# Altium PCB uTCA_MCH_PCB3.pcbdoc (part 5 of 8)
Units mm, origin at the board's own origin, x right, y up, seen from the top; angles counter-clockwise.
Board outline 182.75 x 75.8 mm, 10 copper layers (Top Layer, GND1, MidLayer1, PWR1, Mid-Layer 2, GND2, PWR2, Mid-Layer 3, GND3, Bottom Layer), stack 1.568 mm thick; 778 components, 977 nets, 4756 pads, 1214 vias.
Unrouted connection lines stored in the file: 1790.
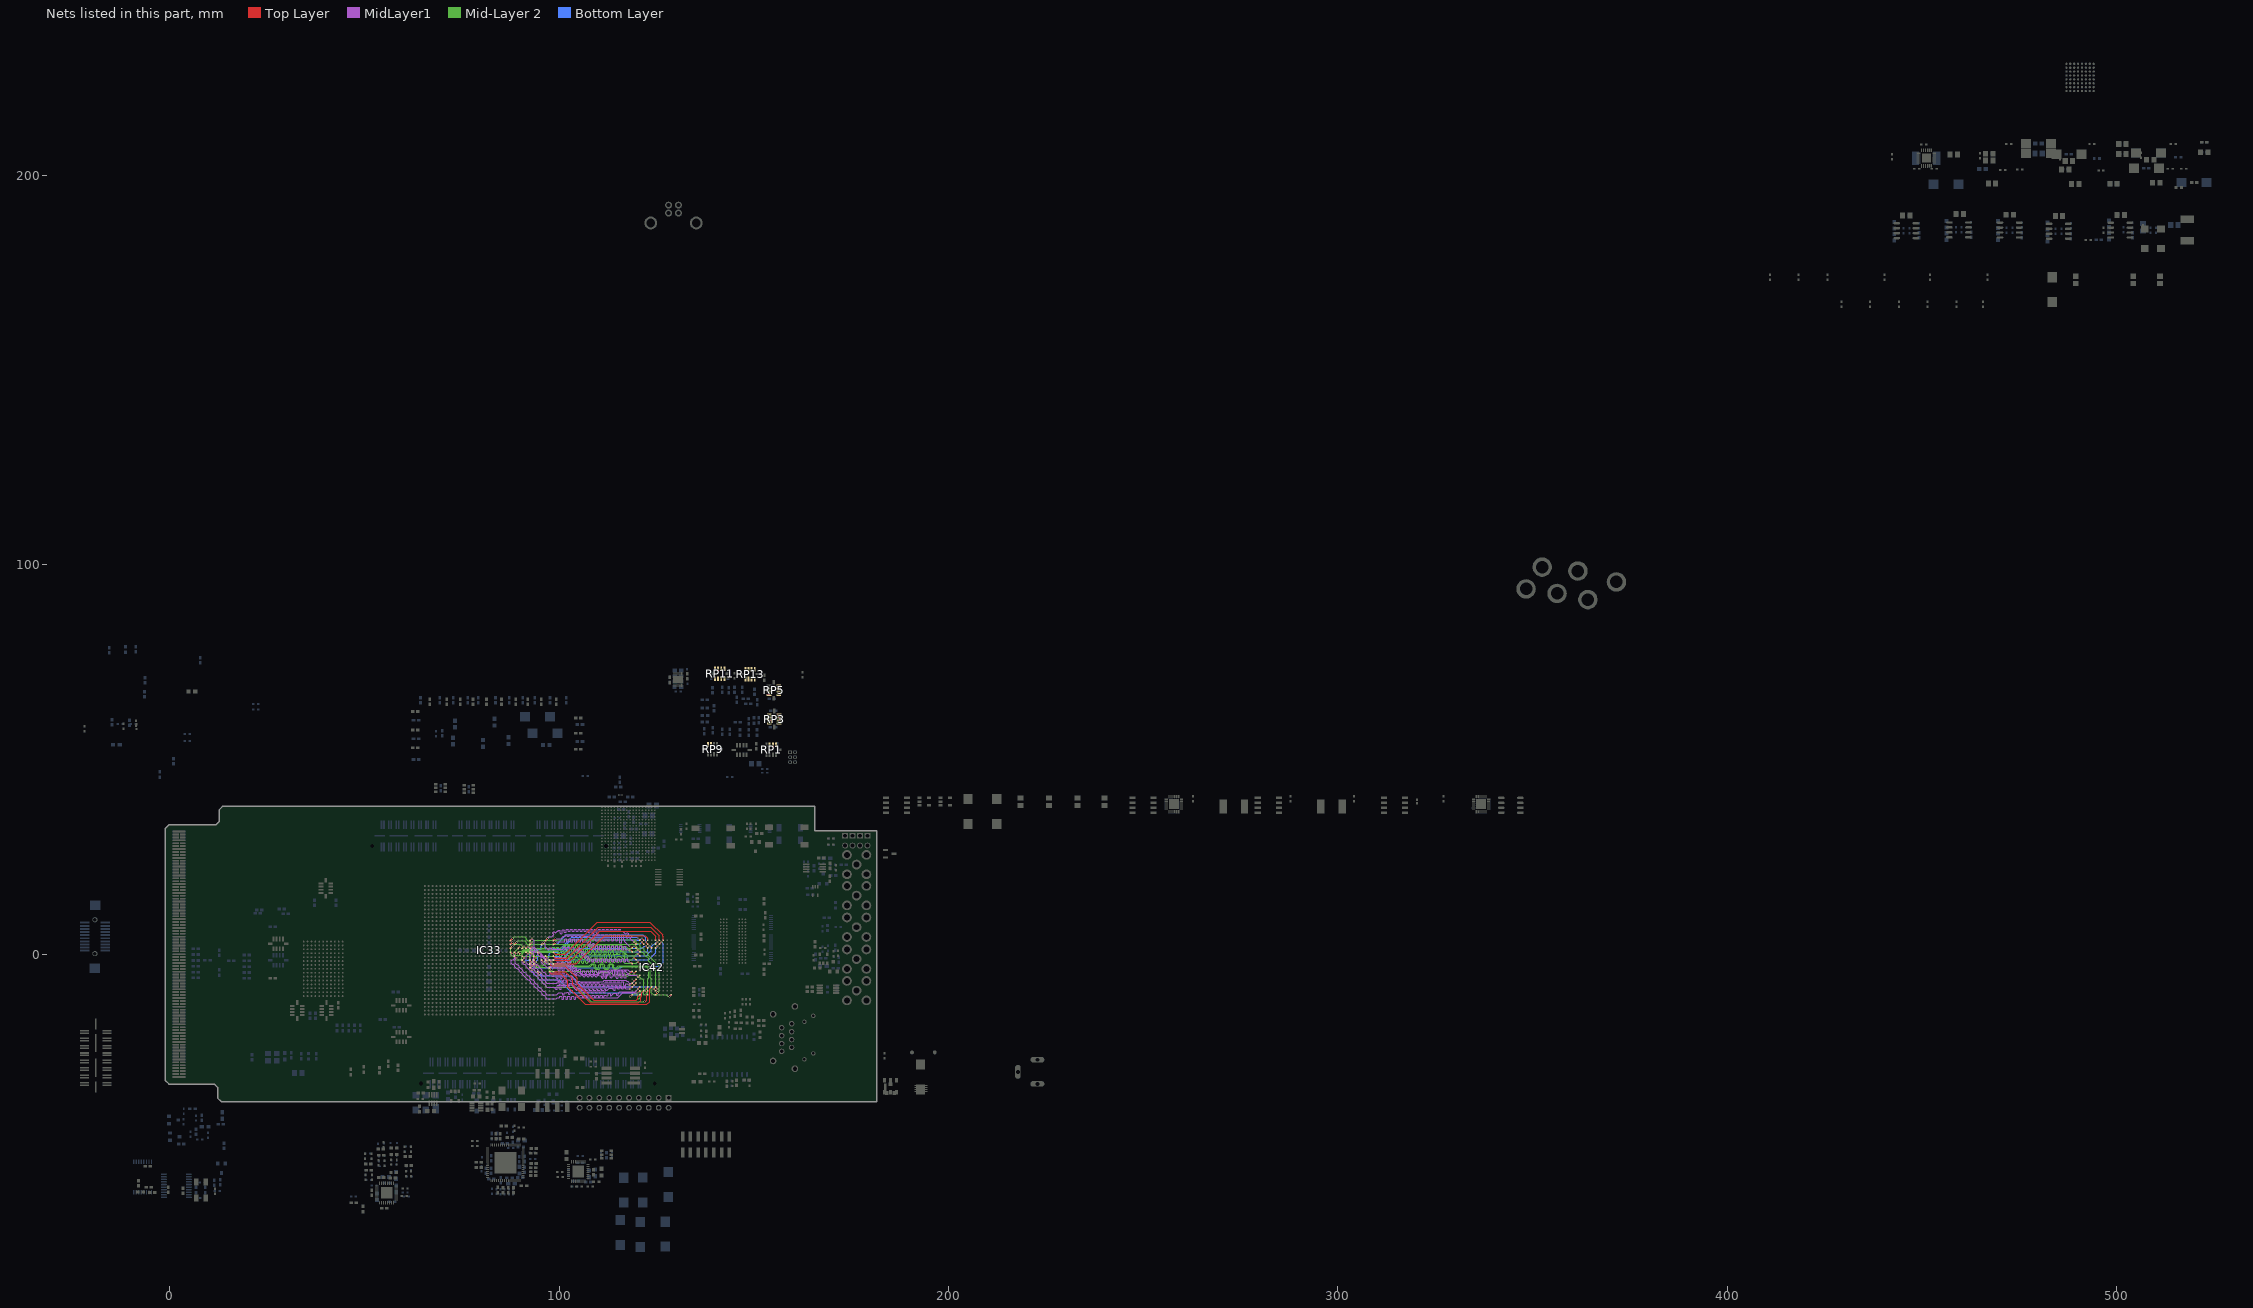
[diagram p13: the nets of this part, all layers, seen from the top]

## Via types
v1: diameter 0.5, hole 0.2, Top Layer to Bottom Layer, 1149 vias
v2: diameter 0.508, hole 0.254, Top Layer to Bottom Layer, 32 vias
v3: diameter 0.66, hole 0.33, Top Layer to Bottom Layer, tented top, 29 vias
v4: diameter 0.5, hole 0.2, Top Layer to Bottom Layer, tented top, 4 vias

## Nets (pads, with @x,y where several pads share a name; then routed paths per layer and width w, separated by ;. In a path a pad name is that pad's centre, name@x,y a point inside that pad or via, vN(x,y) a via of type N, cw(c..) or ccw(c..) an arc to the next point about the centre after c; other vN are vias at no path point) (continued)
Q1_A1: IC33.A23 IC42.B8 RP5.3 | length 29.7
  Top Layer w0.175: IC33.A23@98.5,-4.5 101.6,-4.5 103.45,-6.35 103.45,-7.9 108,-12.45 120.35,-12.45 120.9,-11.9 120.9,-11 121.25,-10.65 121.25,-9.9 IC42.B8@121.75,-9.4
Q1_A2: IC33.E23 IC42.C5 RP5.4 | length 33.3
  Top Layer w0.175: IC33.E23@94.5,-4.5 v1(95,-5) ; IC42.C5@124.75,-8.4 v1(125.25,-8.9)
  Bottom Layer w0.175: v1(95,-5) 95.5,-5.5 103.05,-5.5 105.95,-8.4 124.75,-8.4 v1(125.25,-8.9)
Q1_A3: IC33.B23 IC42.C6 RP5.5 | length 34.4
  Top Layer w0.175: IC33.B23@97.5,-4.5 98,-5 100.4,-5 102.25,-6.85 102.25,-8.4 106.75,-12.9 122.5,-12.9 123.25,-12.15 123.25,-8.9 IC42.C6@123.75,-8.4
Q1_A4: IC33.G22 IC42.C7 RP5.7 | length 34.5
  Top Layer w0.175: IC33.G22@92.5,-3.5 v1(93,-4) ; v1(122.25,-8.9) IC42.C7@122.75,-8.4
  Bottom Layer w0.175: v1(93,-4) 93,-4.346 93.463,-4.808 93.463,-5.117 93.808,-5.463 94.117,-5.463 94.538,-5.883 94.538,-6.192 94.883,-6.538 99.888,-6.538 103.25,-9.9 118.65,-9.9 119.113,-10.363 120.887,-10.363 122.25,-9 v1(122.25,-8.9)
Q1_A5: IC33.G21 IC42.N5 RP5.8 | length 36.9
  Top Layer w0.175: IC33.G21@92.5,-2.5 93.051,-3.051 v1(93.061,-3.051) ; IC42.N5@124.75,1.6 v1(125.25,2.1)
  MidLayer1 w0.109: v1@93.051,-3.051 v1(93.061,-3.051)
  Bottom Layer w0.175: v1(93.061,-3.051) 93.129,-3.051 93.578,-3.5 97.7,-3.5 98.2,-3 101.75,-3 103.388,-1.362 123.038,-1.362 124.787,0.387 124.787,1.292 125.25,1.754 v1(125.25,2.1)
Q1_A6: IC33.D20 IC42.N6 RP5.9 | length 30.7
  Top Layer w0.175: IC33.D20@95.5,-1.5 v1(96,-2) ; v1(123.25,2.1) IC42.N6@123.75,1.6
  Bottom Layer w0.175: v1(96,-2) 96.5,-1.5 100.6,-1.5 102.738,0.638 122.442,0.638 122.75,0.946 122.75,1.6 v1(123.25,2.1)
Q1_A7: IC33.C19 IC42.N7 RP5.10 | length 27.9
  Top Layer w0.175: IC33.C19@96.5,-0.5 v1(97,-1) ; v1(122.25,2.1) IC42.N7@122.75,1.6
  Bottom Layer w0.175: v1(97,-1) 97.078,-1 97.591,-0.487 100.513,-0.487 102.35,1.35 104.85,1.35 105.087,1.587 121.337,1.587 121.85,2.1 v1(122.25,2.1)
Q1_A8: IC33.B22 IC42.P4 RP3.2 | length 36.3
  Top Layer w0.175: IC33.B22@97.5,-3.5 v1(98,-4) ; IC42.P4@125.75,2.6 v1(126.25,3.1)
  Bottom Layer w0.175: v1(98,-4) 98.463,-3.538 115.862,-3.538 116.3,-3.1 125.654,-3.1 126.75,-2.004 126.75,2.6 126.3,3.05 v1@126.25,3.05
Q1_A9: IC33.C20 IC42.P5 RP3.3 | length 32.9
  Top Layer w0.175: IC33.C20@96.5,-1.5 v1(97,-2) ; IC42.P5@124.75,2.6 v1(125.25,3.1)
  Bottom Layer w0.175: v1(97,-2) 97.488,-2.488 101.112,-2.488 103.238,-0.362 122.442,-0.362 122.712,-0.092 122.712,0.117 123.233,0.638 123.442,0.638 123.712,0.908 123.712,1.388 ; 123.7,1.4 123.712,1.388 ; v1(125.25,3.1) 124.95,3.1 123.712,1.862 123.712,1.388
Q1_A10: IC33.J20 IC42.P7 RP3.4 | length 38.1
  Top Layer w0.175: IC33.J20@90.5,-1.5 v1(91,-2) ; v1(122.25,3.1) IC42.P7@122.75,2.6
  Bottom Layer w0.175: v1(91,-2) 91.479,-1.521 92.168,-1.521 92.5,-1.189 92.5,0.5 93.538,1.538 95.192,1.538 95.463,1.808 95.463,2.117 95.858,2.512 99.438,2.512 99.925,3 99.925,3.025 101.85,4.95 121.487,4.95 122.25,4.187 v1(122.25,3.1)
Q1_A11: IC33.F20 IC42.P8 RP3.5 | length 31.3
  Top Layer w0.175: IC33.F20@93.5,-1.5 v1(94,-2) ; v1(121.25,3.1) IC42.P8@121.75,2.6
  Bottom Layer w0.175: v1(94,-2) 94.538,-1.463 94.538,-0.808 94.846,-0.5 97.154,-0.5 97.463,-0.192 97.463,0.117 97.808,0.463 100.663,0.463 102.8,2.6 120.75,2.6 v1(121.25,3.1)
Q1_A12: IC33.A18 IC42.R3 RP3.7 | length 34.5
  Top Layer w0.175: IC33.A18@98.5,0.5 99,0 101.55,0 109.8,8.25 123.3,8.25 126.55,5 126.55,4.65 126.75,4.45 IC42.R3@126.75,3.6
Q1_A13: IC33.A19 IC42.R4 RP3.8 | length 32.8
  Top Layer w0.175: IC33.A19@98.5,-0.5 99,-1 101.2,-1 102.1,-1 110.05,6.95 123.5,6.95 125.75,4.7 IC42.R4@125.75,3.6
Q1_A14: IC33.A20 IC42.R5 RP3.9 | length 30.9
  Top Layer w0.175: IC33.A20@98.5,-1.5 103,-1.5 110.4,5.9 123.5,5.9 124.75,4.65 IC42.R5@124.75,3.6
Q1_A15: IC33.A21 IC42.R7 RP3.10 | length 28.1
  Top Layer w0.175: IC33.A21@98.5,-2.5 104.4,-2.5 111.7,4.8 122.1,4.8 122.75,4.15 IC42.R7@122.75,3.6
Q1_A16: IC33.F19 IC42.R8 RP1.2 | length 31.2
  Top Layer w0.175: IC33.F19@93.5,-0.5 v1(94,-1) ; v1(121.25,4.1) IC42.R8@121.75,3.6
  Bottom Layer w0.175: v1(94,-1) 94,-0.654 94.463,-0.192 94.463,0.117 95.046,0.7 97.046,0.7 97.496,1.15 100.65,1.15 103.15,3.65 120.046,3.65 120.058,3.637 120.442,3.637 120.454,3.65 120.8,3.65 v1(121.25,4.1)
Q1_A17: IC33.G20 IC42.R9 RP1.3 | length 32.6
  Top Layer w0.175: IC33.G20@92.5,-1.5 v1(93,-2) ; v1(120.25,4.1) 120.3,4.05 IC42.R9@120.75,3.6
  Bottom Layer w0.175: v1(93,-2) 93.538,-1.463 93.538,0.438 94.338,1.238 95.316,1.238 95.578,1.5 100.4,1.5 103.3,4.4 119.95,4.4 v1(120.25,4.1)
Q1_A18: IC33.B21 IC42.A9 RP1.4 | length 28.9
  Top Layer w0.175: IC33.B21@97.5,-2.5 98,-3 100.25,-3 101.5,-3 104.65,-6.15 104.65,-7.55 108.95,-11.85 119.85,-11.85 120.25,-11.45 120.25,-10.9 IC42.A9@120.75,-10.4
Q1_BWS0: IC33.K17 IC42.B7 | length 47.9
  Top Layer w0.175: IC33.K17@89.5,1.5 v1(90,2) ; v1(122.25,-9.9) IC42.B7@122.75,-9.4
  Mid-Layer 2 w0.109: v1(90,2) 88.5,0.5 88.5,-0.107 88.843,-0.45 90.157,-0.45 90.571,-0.037 90.571,0.178 90.893,0.5 92.2,0.5 92.55,0.15 92.55,-0.25 92.87,-0.57 93.178,-0.57 93.546,-0.938 93.546,-3.188 93.857,-3.5 97.107,-3.5 97.43,-3.822 97.43,-4.08 97.85,-4.5 109.484,-4.5 109.684,-4.7 113.3,-4.7 114,-5.4 115.135,-5.4 115.258,-5.277 115.258,-5.223 115.381,-5.1 115.75,-5.1 115.873,-5.223 115.873,-5.577 115.996,-5.7 116.365,-5.7 116.488,-5.577 116.488,-5.223 116.612,-5.1 116.981,-5.1 117.104,-5.223 117.104,-5.577 117.227,-5.7 117.596,-5.7 117.719,-5.577 117.719,-5.523 117.842,-5.4 120.357,-5.4 120.679,-5.722 120.679,-5.937 121.213,-6.471 121.428,-6.471 121.7,-6.743 121.7,-8.957 122.072,-9.33 122.08,-9.33 122.25,-9.5 v1(122.25,-9.9)
Q1_BWS1: IC33.M17 IC42.A7 | length 48.3
  Top Layer w0.175: IC33.M17@87.5,1.5 v1(88,2) ; v1(121.9,-12.2) 122.1,-12.2 122.5,-11.8 122.5,-10.65 IC42.A7@122.75,-10.4
  Mid-Layer 2 w0.109: v1(88,2) 87.571,1.571 87.571,-0.178 87.822,-0.43 88.037,-0.43 88.571,-0.963 88.571,-1.178 88.843,-1.45 90.157,-1.45 90.43,-1.178 90.43,-0.963 90.893,-0.5 92.143,-0.5 92.455,-0.812 92.455,-3.052 92.973,-3.571 93.178,-3.571 93.571,-3.963 93.571,-4.178 93.893,-4.5 94.2,-4.5 94.5,-4.8 94.5,-6.107 94.893,-6.5 95.15,-6.5 95.5,-6.85 95.5,-7.107 95.893,-7.5 96.107,-7.5 96.43,-7.822 96.43,-8.23 96.7,-8.5 104.55,-8.5 108.3,-12.25 121.85,-12.25 v1(121.9,-12.2)
Q1_BWS2: IC33.G16 IC42.A5 | length 48.2
  Top Layer w0.175: IC33.G16@92.5,2.5 v1(93,3) ; IC42.A5@124.75,-10.4 125.25,-9.9 v1(125.25,-9.85)
  Mid-Layer 2 w0.109: v1(93,3) 93.5,3.5 99.3,3.5 99.4,3.6 106.235,3.6 106.358,3.723 106.358,3.777 106.481,3.9 106.85,3.9 106.973,3.777 106.973,3.423 107.096,3.3 107.465,3.3 107.588,3.423 107.588,3.777 107.712,3.9 108.081,3.9 108.204,3.777 108.204,3.423 108.327,3.3 108.696,3.3 108.819,3.423 108.819,3.777 108.942,3.9 109.312,3.9 109.435,3.777 109.435,3.423 109.558,3.3 109.927,3.3 110.05,3.423 110.05,3.777 110.173,3.9 110.542,3.9 110.665,3.777 110.665,3.423 110.789,3.3 111.158,3.3 111.281,3.423 111.281,3.481 111.4,3.6 119.357,3.6 119.82,3.137 119.82,2.922 120.072,2.671 120.287,2.671 120.77,2.187 120.77,1.972 121.213,1.53 121.428,1.53 121.82,1.137 121.82,0.922 122.213,0.53 122.428,0.53 122.87,0.087 122.87,-0.27 125.7,-3.1 125.7,-9.4 v1(125.25,-9.85)
Q1_BWS3: IC33.M15 IC42.B5 | length 48.3
  Top Layer w0.175: IC33.M15@87.5,3.5 v1(88,4) ; v1@124.3,-8.95 v1(124.25,-8.9) IC42.B5@124.75,-9.4
  Mid-Layer 2 w0.109: v1(88,4) 88.05,4 88.48,4.43 91.178,4.43 91.571,4.037 91.571,3.822 91.963,3.43 92.178,3.43 92.571,3.037 92.571,2.822 92.843,2.55 119.357,2.55 119.82,2.087 119.82,1.922 120.213,1.53 120.428,1.53 120.82,1.137 120.82,0.922 121.213,0.53 121.428,0.53 121.82,0.137 121.82,-0.078 122.213,-0.47 122.428,-0.47 123,-1.043 123,-1.75 124.75,-3.5 124.75,-8.4 v1(124.25,-8.9)
Q1_CQ_N: IC33.F21 IC42.A1 | length 48.3
  Top Layer w0.125: IC33.F21@93.5,-2.5 v1(94,-3) ; v1(128.3,-10.85) IC42.A1@128.75,-10.4
  Mid-Layer 2 w0.1: v1(94,-3) 94.05,-2.95 95.8,-2.95 96.52,-2.23 96.52,-1.78 96.8,-1.5 97.707,-1.5 97.768,-1.439 98.232,-1.439 98.293,-1.5 100.6,-1.5 102.089,-2.989 107.739,-2.989 108.339,-2.389 108.955,-2.389 109.411,-2.845 109.411,-3.345 109.655,-3.589 109.973,-3.589 110.217,-3.345 110.217,-2.845 110.673,-2.389 111.289,-2.389 111.745,-2.845 111.745,-3.345 111.99,-3.589 112.307,-3.589 112.552,-3.345 112.552,-2.845 113.007,-2.389 113.624,-2.389 114.08,-2.845 114.08,-3.345 114.324,-3.589 114.642,-3.589 115.242,-2.989 122.599,-2.989 123.411,-3.801 123.411,-6.061 123.7,-6.35 123.7,-9.85 124.3,-10.45 127.5,-10.45 127.9,-10.85 v1(128.3,-10.85)
Q1_CQ_P: IC33.B20 IC42.A11 | length 48.3
  Top Layer w0.125: IC33.B20@97.5,-1.5 v1(98,-2) ; v1(118.25,-10.9) IC42.A11@118.75,-10.4
  Mid-Layer 2 w0.1: v1(98,-2) 98.5,-2.5 99.6,-3.6 100.2,-3.6 100.403,-3.397 100.403,-2.297 100.55,-2.15 100.74,-2.15 101.94,-3.35 107.888,-3.35 108.488,-2.75 108.806,-2.75 109.05,-2.994 109.05,-3.494 109.506,-3.95 110.122,-3.95 110.578,-3.494 110.578,-2.994 110.822,-2.75 111.14,-2.75 111.384,-2.994 111.384,-3.494 111.84,-3.95 112.457,-3.95 112.912,-3.494 112.912,-2.994 113.157,-2.75 113.474,-2.75 113.719,-2.994 113.719,-3.494 114.175,-3.95 114.791,-3.95 115.391,-3.35 122.45,-3.35 123.05,-3.95 123.05,-6.1 122.8,-6.35 122.8,-9.086 122.8,-9.986 122.386,-10.4 121.864,-10.4 121.622,-10.158 121.622,-9.642 121.38,-9.4 121.058,-9.4 120.816,-9.642 120.816,-11.154 120.574,-11.396 120.252,-11.396 120.01,-11.154 120.01,-10.296 119.768,-10.054 119.445,-10.054 119.099,-10.4 118.75,-10.4 v1(118.25,-10.9)
Q1_D0: IC33.C15 IC42.P10 RP13.10 | length 48.1
  Top Layer w0.175: IC33.C15@96.5,3.5 v1(97,4) ; v1(119.25,3.1) IC42.P10@119.75,2.6
  MidLayer1 w0.109: v1(97,4) 97.43,4.43 98.099,4.43 98.619,4.95 98.619,5.096 98.34,5.374 98.34,5.52 98.559,5.739 98.705,5.739 98.983,5.46 99.129,5.46 99.503,5.834 99.658,5.834 99.761,5.937 99.761,6.093 99.864,6.196 100.173,6.196 100.276,6.093 100.276,5.337 100.379,5.234 100.688,5.234 100.792,5.337 100.792,6.123 100.895,6.226 101.204,6.226 101.307,6.123 101.307,5.681 101.41,5.578 101.719,5.578 101.822,5.681 101.822,6.331 101.925,6.434 102.235,6.434 102.338,6.331 102.338,5.937 102.441,5.834 102.75,5.834 102.853,5.937 102.853,6.331 102.956,6.434 103.265,6.434 103.369,6.331 103.369,5.937 103.472,5.834 103.781,5.834 103.884,5.937 103.884,6.331 103.987,6.434 104.296,6.434 104.399,6.331 104.399,5.937 104.502,5.834 104.812,5.834 104.915,5.937 104.915,6.331 105.018,6.434 105.327,6.434 105.43,6.331 105.43,5.937 105.533,5.834 105.842,5.834 105.946,5.937 105.946,6.331 106.049,6.434 106.358,6.434 106.461,6.331 106.461,5.937 106.564,5.834 106.873,5.834 106.976,5.937 106.976,6.331 107.079,6.434 107.389,6.434 107.492,6.331 107.492,5.663 107.595,5.56 107.904,5.56 108.007,5.663 108.007,6.331 108.11,6.434 108.419,6.434 108.523,6.331 108.523,5.537 108.626,5.434 108.935,5.434 109.038,5.537 109.038,6.331 109.141,6.434 109.45,6.434 109.553,6.331 109.553,5.537 109.656,5.434 109.966,5.434 110.069,5.537 110.069,6.331 110.172,6.434 110.481,6.434 110.584,6.331 110.584,5.937 110.687,5.834 110.996,5.834 111.1,5.937 111.1,6.331 111.203,6.434 111.512,6.434 111.615,6.331 111.615,5.937 111.718,5.834 112.027,5.834 112.13,5.937 112.13,6.331 112.233,6.434 112.543,6.434 112.646,6.331 112.646,5.937 112.749,5.834 113.058,5.834 113.161,5.937 113.161,6.331 113.264,6.434 113.573,6.434 113.677,6.331 113.677,5.937 113.78,5.834 114.089,5.834 114.192,5.937 114.192,6.331 114.295,6.434 114.604,6.434 114.707,6.331 114.707,5.937 114.81,5.834 115.12,5.834 115.223,5.937 115.223,6.331 115.326,6.434 115.635,6.434 115.738,6.331 115.738,5.937 115.841,5.834 116.366,5.834 117.009,5.191 117.155,5.191 117.504,5.54 117.65,5.54 117.869,5.321 117.869,5.175 117.184,4.491 117.184,4.345 117.403,4.126 117.548,4.126 117.811,4.389 118.233,4.811 118.379,4.811 118.598,4.592 118.598,4.447 118.248,4.097 118.248,3.952 118.67,3.53 118.82,3.53 v1(119.25,3.1)
Q1_D1: IC33.A15 IC42.N11 RP13.9 | length 48.2
  Top Layer w0.175: IC33.A15@98.5,3.5 v1(99,4) ; v1(118.25,2.05) v1@118.25,2.1 ; v1@118.25,2.1 IC42.N11@118.75,1.6
  MidLayer1 w0.109: v1(99,4) 100.25,4 100.55,4 101.1,4.55 101.505,4.55 101.608,4.653 101.608,4.947 101.711,5.05 102.02,5.05 102.123,4.947 102.123,4.653 102.226,4.55 102.535,4.55 102.638,4.653 102.638,4.947 102.742,5.05 103.051,5.05 103.154,4.947 103.154,4.653 103.257,4.55 103.566,4.55 103.669,4.653 103.669,4.947 103.772,5.05 104.082,5.05 104.185,4.947 104.185,4.653 104.288,4.55 104.597,4.55 104.7,4.653 104.7,4.947 104.803,5.05 105.112,5.05 105.215,4.947 105.215,4.653 105.319,4.55 105.628,4.55 105.731,4.653 105.731,4.947 105.834,5.05 106.143,5.05 106.246,4.947 106.246,4.653 106.349,4.55 107.75,4.55 108.55,3.75 108.705,3.75 108.808,3.853 108.808,4.847 108.911,4.95 109.22,4.95 109.323,4.847 109.323,3.591 109.426,3.488 109.735,3.488 109.838,3.591 109.838,4.847 109.942,4.95 110.251,4.95 110.354,4.847 110.354,3.591 110.457,3.488 110.766,3.488 110.869,3.591 110.869,4.847 110.972,4.95 111.282,4.95 111.385,4.847 111.385,3.591 111.488,3.488 111.797,3.488 111.9,3.591 111.9,4.847 112.003,4.95 112.312,4.95 112.415,4.847 112.415,3.591 112.519,3.488 112.828,3.488 112.931,3.591 112.931,4.847 113.034,4.95 113.343,4.95 113.446,4.847 113.446,3.591 113.549,3.488 113.859,3.488 113.962,3.591 113.962,4.847 114.065,4.95 114.374,4.95 114.477,4.847 114.477,3.591 114.58,3.488 114.889,3.488 114.992,3.591 114.992,4.847 115.096,4.95 115.405,4.95 115.508,4.847 115.508,2.987 115.611,2.884 115.92,2.884 116.023,2.987 116.023,4.847 116.126,4.95 116.436,4.95 116.539,4.847 116.539,3.761 116.8,3.5 116.8,3.15 117.95,2 118.25,2 v1(118.25,2.05)
Q1_D2: IC33.A16 IC42.M11 RP13.8 | length 48.3
  Top Layer w0.175: IC33.A16@98.5,2.5 v1(99,3) ; v1(118.25,1.1) IC42.M11@118.75,0.6
  MidLayer1 w0.109: v1(99,3) 99.05,3 99.2,3.15 101.335,3.15 101.438,3.253 101.438,3.847 101.542,3.95 101.851,3.95 101.954,3.847 101.954,3.253 102.057,3.15 102.366,3.15 102.469,3.253 102.469,3.847 102.572,3.95 102.882,3.95 102.985,3.847 102.985,3.253 103.088,3.15 103.397,3.15 103.5,3.253 103.5,3.847 103.603,3.95 103.912,3.95 104.015,3.847 104.015,3.253 104.119,3.15 104.428,3.15 104.531,3.253 104.531,3.847 104.634,3.95 104.943,3.95 105.046,3.847 105.046,3.253 105.149,3.15 105.459,3.15 105.562,3.253 105.562,3.847 105.665,3.95 105.974,3.95 106.077,3.847 106.077,3.253 106.18,3.15 107.1,3.15 107.284,2.966 107.43,2.966 107.78,3.316 107.926,3.316 108.145,3.097 108.145,2.952 107.722,2.528 107.46,2.267 107.46,2.121 107.679,1.902 107.824,1.902 108.086,2.164 108.698,2.776 108.844,2.776 109.062,2.557 109.062,2.411 108.451,1.799 108.189,1.538 108.189,1.392 108.408,1.173 108.553,1.173 108.742,1.362 108.888,1.362 109.15,1.1 109.305,1.1 109.408,1.203 109.408,2.097 109.511,2.2 109.82,2.2 109.923,2.097 109.923,1.203 110.026,1.1 110.335,1.1 110.438,1.203 110.438,2.097 110.542,2.2 110.851,2.2 110.954,2.097 110.954,1.203 111.057,1.1 111.366,1.1 111.469,1.203 111.469,2.097 111.572,2.2 111.882,2.2 111.985,2.097 111.985,1.203 112.088,1.1 112.397,1.1 112.5,1.203 112.5,2.097 112.603,2.2 112.912,2.2 113.015,2.097 113.015,1.203 113.119,1.1 113.428,1.1 113.531,1.203 113.531,2.097 113.634,2.2 113.943,2.2 114.046,2.097 114.046,1.203 114.149,1.1 114.459,1.1 114.562,1.203 114.562,2.097 114.665,2.2 114.974,2.2 115.077,2.097 115.077,1.203 115.18,1.1 115.489,1.1 115.592,1.203 115.592,2.097 115.696,2.2 116.005,2.2 116.108,2.097 116.108,1.203 116.211,1.1 116.52,1.1 116.623,1.203 116.623,1.931 116.726,2.034 117.036,2.034 117.139,1.931 117.139,1.203 117.242,1.1 v1(118.25,1.1)
Q1_D3: IC33.L18 IC42.K10 RP13.7 | length 48.1
  Top Layer w0.175: IC33.L18@88.5,0.5 v1(89,0) ; v1(119.25,-0.9) IC42.K10@119.75,-1.4
  Mid-Layer 2 w0.109: v1(89,0) 89.7,0.7 90.369,0.7 90.637,0.968 92.413,0.968 92.717,0.664 93.275,0.664 93.488,0.45 98.45,0.45 99.15,-0.25 99.335,-0.25 99.458,-0.127 99.458,0.127 99.581,0.25 99.95,0.25 100.073,0.127 100.073,-0.543 100.196,-0.666 100.565,-0.666 100.688,-0.543 100.688,0.127 100.812,0.25 101.181,0.25 101.304,0.127 101.304,-0.627 101.427,-0.75 101.796,-0.75 101.919,-0.627 101.919,-0.373 102.042,-0.25 102.3,-0.25 102.45,-0.4 102.45,-1.15 102.6,-1.3 102.785,-1.3 102.908,-1.177 102.908,-0.923 103.031,-0.8 103.4,-0.8 103.523,-0.923 103.523,-1.177 103.646,-1.3 104.015,-1.3 104.138,-1.177 104.138,-0.923 104.262,-0.8 104.631,-0.8 104.754,-0.923 104.754,-1.177 104.877,-1.3 105.246,-1.3 105.369,-1.177 105.369,-0.923 105.492,-0.8 105.862,-0.8 105.985,-0.923 105.985,-1.177 106.108,-1.3 106.477,-1.3 106.6,-1.177 106.6,-0.923 106.723,-0.8 107.092,-0.8 107.215,-0.923 107.215,-1.177 107.339,-1.3 107.65,-1.3 108.25,-0.7 108.435,-0.7 108.558,-0.577 108.558,-0.323 108.681,-0.2 109.05,-0.2 109.173,-0.323 109.173,-0.893 109.296,-1.016 109.665,-1.016 109.788,-0.893 109.788,-0.323 109.912,-0.2 110.281,-0.2 110.404,-0.323 110.404,-0.893 110.527,-1.016 110.896,-1.016 111.019,-0.893 111.019,-0.323 111.142,-0.2 111.512,-0.2 111.635,-0.323 111.635,-0.893 111.758,-1.016 112.127,-1.016 112.25,-0.893 112.25,-0.323 112.373,-0.2 112.742,-0.2 112.865,-0.323 112.865,-0.903 112.989,-1.026 113.358,-1.026 113.481,-0.903 113.481,-0.323 113.604,-0.2 113.973,-0.2 114.096,-0.323 114.096,-0.893 114.219,-1.016 114.589,-1.016 114.712,-0.893 114.857,-0.893 114.95,-0.8 114.95,-0.7 115.1,-0.55 115.75,-0.55 116.6,-1.4 116.785,-1.4 116.908,-1.277 116.908,-0.757 117.031,-0.634 117.4,-0.634 117.523,-0.757 117.523,-1.277 117.646,-1.4 118.6,-1.4 119.1,-0.9 v1(119.25,-0.9)
Q1_D4: IC33.D16 IC42.J11 RP13.5 | length 48
  Top Layer w0.175: IC33.D16@95.5,2.5 v1(96,3) ; v1(118.25,-1.9) IC42.J11@118.75,-2.4
  MidLayer1 w0.109: v1(96,3) 96.43,2.571 96.43,1.963 97.093,1.3 97.405,1.3 97.508,1.403 97.508,1.518 97.611,1.622 97.771,1.622 97.772,1.62 97.921,1.62 98.023,1.518 98.023,1.403 98.126,1.3 100.905,1.3 101.008,1.403 101.008,1.713 101.111,1.816 101.42,1.816 101.523,1.713 101.523,1.403 101.626,1.3 101.935,1.3 102.038,1.403 102.038,1.713 102.142,1.816 102.451,1.816 102.554,1.713 102.554,1.403 102.657,1.3 102.966,1.3 103.069,1.403 103.069,1.713 103.172,1.816 103.482,1.816 103.585,1.713 103.585,1.615 103.927,1.273 103.927,1.06 104.038,0.95 104.25,0.95 104.491,1.191 104.605,1.191 105.069,1.654 105.215,1.654 105.433,1.436 105.433,1.29 104.97,0.826 104.97,0.68 105.188,0.462 105.334,0.462 105.798,0.926 105.944,0.926 106.162,0.707 106.162,0.561 105.698,0.097 105.698,-0.048 105.917,-0.267 106.063,-0.267 106.527,0.197 106.672,0.197 106.891,-0.022 106.891,-0.168 106.427,-0.632 106.427,-0.777 106.646,-0.996 106.792,-0.996 107.256,-0.532 107.401,-0.532 107.62,-0.751 107.62,-0.897 107.156,-1.36 107.156,-1.706 107.35,-1.9 107.705,-1.9 107.808,-1.797 107.808,-1.237 107.911,-1.134 108.22,-1.134 108.323,-1.237 108.323,-1.797 108.426,-1.9 108.735,-1.9 108.838,-1.797 108.838,-1.237 108.942,-1.134 109.251,-1.134 109.354,-1.237 109.354,-1.797 109.457,-1.9 109.766,-1.9 109.869,-1.797 109.869,-1.237 109.972,-1.134 110.282,-1.134 110.385,-1.237 110.385,-1.797 110.488,-1.9 110.797,-1.9 110.9,-1.797 110.9,-1.237 111.003,-1.134 111.312,-1.134 111.415,-1.237 111.415,-1.797 111.519,-1.9 111.828,-1.9 111.931,-1.797 111.931,-1.237 112.034,-1.134 112.343,-1.134 112.446,-1.237 112.446,-1.797 112.549,-1.9 112.859,-1.9 112.962,-1.797 112.962,-1.237 113.065,-1.134 113.374,-1.134 113.477,-1.237 113.477,-1.797 113.58,-1.9 113.889,-1.9 113.992,-1.797 113.992,-1.237 114.096,-1.134 114.405,-1.134 114.508,-1.237 114.508,-1.797 114.611,-1.9 114.92,-1.9 115.023,-1.797 115.023,-1.237 115.126,-1.134 115.436,-1.134 115.539,-1.237 115.539,-1.797 115.642,-1.9 115.951,-1.9 116.054,-1.797 116.054,-1.237 116.157,-1.134 116.466,-1.134 116.569,-1.237 116.569,-1.797 116.673,-1.9 116.982,-1.9 117.085,-1.797 117.085,-1.237 117.188,-1.134 117.497,-1.134 117.6,-1.237 117.6,-1.797 117.703,-1.9 v1(118.25,-1.9)
Q1_D5: IC33.E18 IC42.G11 RP13.4 | length 48.1
  Top Layer w0.175: IC33.E18@94.5,0.5 v1(95,0) ; v1(118.25,-4.9) IC42.G11@118.75,-4.4
  MidLayer1 w0.109: v1(95,0) 96.43,-1.429 96.43,-2.037 96.847,-2.455 97.105,-2.455 97.109,-2.45 97.743,-2.45 97.847,-2.553 98.089,-2.553 98.192,-2.45 98.37,-2.45 98.473,-2.553 98.473,-3.163 98.576,-3.266 98.885,-3.266 98.988,-3.163 98.988,-2.409 99.092,-2.305 99.401,-2.305 99.504,-2.409 99.504,-3.163 99.607,-3.266 99.916,-3.266 100.019,-3.163 100.019,-2.409 100.122,-2.305 100.432,-2.305 100.535,-2.409 100.535,-3.163 100.638,-3.266 100.947,-3.266 101.05,-3.163 101.05,-2.347 101.153,-2.244 101.462,-2.244 101.565,-2.347 101.565,-3.163 101.669,-3.266 101.978,-3.266 102.081,-3.163 102.081,-2.853 102.184,-2.75 102.35,-2.75 102.45,-2.85 102.45,-3.1 102.538,-3.188 102.656,-3.188 102.713,-3.131 102.831,-3.131 103.007,-3.307 103.007,-3.424 102.765,-3.666 102.765,-3.784 102.941,-3.96 103.059,-3.96 103.301,-3.718 103.418,-3.718 103.594,-3.894 103.594,-4.012 103.352,-4.254 103.352,-4.371 103.529,-4.548 103.646,-4.548 104.148,-4.046 104.265,-4.046 104.441,-4.222 104.441,-4.34 103.94,-4.841 103.94,-4.959 104.116,-5.135 104.233,-5.135 104.301,-5.068 104.418,-5.068 104.836,-4.65 105.05,-4.65 105.5,-5.1 110.156,-5.1 110.396,-4.86 110.396,-4.854 110.45,-4.8 110.575,-4.8 110.658,-4.717 110.658,-4.517 110.741,-4.434 110.99,-4.434 111.073,-4.517 111.073,-5.233 111.156,-5.316 111.405,-5.316 111.488,-5.233 111.488,-4.517 111.572,-4.434 111.821,-4.434 111.904,-4.517 111.904,-5.233 111.987,-5.316 112.236,-5.316 112.319,-5.233 112.319,-4.517 112.402,-4.434 112.652,-4.434 112.735,-4.517 112.735,-4.717 112.818,-4.8 112.95,-4.8 113.2,-4.55 113.325,-4.55 113.408,-4.467 113.408,-4.317 113.491,-4.234 113.74,-4.234 113.823,-4.317 113.823,-5.167 113.906,-5.25 114.155,-5.25 114.238,-5.167 114.238,-4.317 114.322,-4.234 114.571,-4.234 114.654,-4.317 114.654,-5.083 114.737,-5.166 114.986,-5.166 115.069,-5.083 115.069,-4.317 115.152,-4.234 115.402,-4.234 115.485,-4.317 115.485,-5.083 115.568,-5.166 115.817,-5.166 115.9,-5.083 115.9,-4.317 115.983,-4.234 116.232,-4.234 116.315,-4.317 116.315,-5.083 116.399,-5.166 116.648,-5.166 116.731,-5.083 116.731,-4.377 116.814,-4.294 117.063,-4.294 117.146,-4.377 117.146,-4.446 117.6,-4.9 v1(118.25,-4.9)
Q1_D6: IC33.H17 IC42.E10 RP13.3 | length 48.3
  Top Layer w0.175: IC33.H17@91.5,1.5 v1(92,2) ; v1(119.25,-6.9) IC42.E10@119.75,-6.4
  MidLayer1 w0.109: v1(92,2) 92.409,1.591 92.555,1.591 92.611,1.646 92.757,1.646 92.975,1.428 92.975,1.282 92.847,1.153 92.44,0.747 92.44,0.601 92.659,0.382 92.805,0.382 93.138,0.716 93.284,0.716 93.5,0.5 93.5,-1.124 93.397,-1.227 93.38,-1.227 93.277,-1.33 93.277,-1.639 93.38,-1.742 93.397,-1.742 93.5,-1.845 93.5,-2.107 93.938,-2.546 94.188,-2.546 95.571,-3.928 95.571,-4.178 95.963,-4.571 96.178,-4.571 96.571,-4.963 96.571,-5.178 96.822,-5.43 97.605,-5.43 97.708,-5.326 97.708,-4.837 97.811,-4.734 98.12,-4.734 98.223,-4.837 98.223,-5.616 98.326,-5.719 98.635,-5.719 98.738,-5.616 98.738,-4.837 98.842,-4.734 99.151,-4.734 99.254,-4.837 99.254,-6.026 99.357,-6.13 99.666,-6.13 99.769,-6.026 99.769,-4.837 99.872,-4.734 100.182,-4.734 100.285,-4.837 100.285,-6.026 100.388,-6.13 100.697,-6.13 100.8,-6.026 100.8,-4.837 100.903,-4.734 101.212,-4.734 101.315,-4.837 101.315,-6.026 101.419,-6.13 101.728,-6.13 101.831,-6.026 101.831,-5.319 101.95,-5.2 102.2,-5.2 102.75,-5.75 102.914,-5.75 103.094,-5.571 103.24,-5.571 103.458,-5.789 103.458,-5.935 103.272,-6.122 103.11,-6.283 103.11,-6.429 103.329,-6.648 103.474,-6.648 103.636,-6.486 103.823,-6.299 103.969,-6.299 104.187,-6.518 104.187,-6.664 104.073,-6.778 104.073,-6.923 104.45,-7.3 104.605,-7.3 104.708,-7.197 104.708,-7.003 104.811,-6.9 105.12,-6.9 105.254,-7.034 111.316,-7.034 111.6,-6.75 117.15,-6.75 117.4,-7 117.65,-7 118.05,-7.4 118.75,-7.4 v1(119.25,-6.9)
Q1_D7: IC33.G18 IC42.D11 RP13.2 | length 48.3
  Top Layer w0.175: IC33.G18@92.5,0.5 v1(93,0) ; v1(118.25,-7.9) IC42.D11@118.75,-7.4
  MidLayer1 w0.109: v1(93,0) 92.571,-0.43 92.571,-2.178 93.014,-2.621 93.239,-2.621 93.546,-2.928 93.546,-3.188 93.928,-3.571 94.178,-3.571 94.5,-3.893 94.5,-4.107 94.963,-4.571 95.178,-4.571 95.571,-4.963 95.571,-5.178 95.963,-5.571 96.178,-5.571 96.571,-5.963 96.571,-6.178 96.893,-6.5 99.562,-6.5 99.665,-6.603 99.665,-6.697 99.768,-6.8 100.078,-6.8 100.181,-6.697 100.181,-6.603 100.284,-6.5 100.593,-6.5 100.696,-6.603 100.696,-6.697 100.799,-6.8 101.108,-6.8 101.212,-6.697 101.212,-6.603 101.315,-6.5 101.624,-6.5 101.727,-6.603 101.727,-6.697 101.83,-6.8 102.139,-6.8 102.242,-6.697 102.242,-6.603 102.345,-6.5 102.65,-6.5 103.7,-7.55 104.039,-7.55 104.142,-7.653 104.142,-7.747 104.245,-7.85 104.554,-7.85 104.658,-7.747 104.658,-7.653 104.761,-7.55 105.07,-7.55 105.173,-7.653 105.173,-7.747 105.276,-7.85 105.585,-7.85 105.688,-7.747 105.688,-7.371 105.791,-7.268 106.101,-7.268 106.204,-7.371 106.204,-7.747 106.307,-7.85 106.616,-7.85 106.719,-7.747 106.719,-7.371 106.822,-7.268 107.131,-7.268 107.235,-7.371 107.235,-7.747 107.338,-7.85 107.647,-7.85 107.75,-7.747 107.75,-7.371 107.853,-7.268 108.162,-7.268 108.265,-7.371 108.265,-7.747 108.368,-7.85 108.678,-7.85 108.781,-7.747 108.781,-7.371 108.884,-7.268 109.193,-7.268 109.296,-7.371 109.296,-7.747 109.399,-7.85 109.708,-7.85 109.812,-7.747 109.812,-7.371 109.915,-7.268 110.224,-7.268 110.327,-7.371 110.327,-7.747 110.43,-7.85 110.739,-7.85 110.842,-7.747 110.842,-7.653 110.945,-7.55 111.27,-7.55 111.373,-7.653 111.373,-7.947 111.476,-8.05 111.785,-8.05 111.888,-7.947 111.888,-7.153 111.991,-7.05 112.301,-7.05 112.404,-7.153 112.404,-7.947 112.507,-8.05 112.816,-8.05 112.919,-7.947 112.919,-7.153 113.022,-7.05 113.331,-7.05 113.435,-7.153 113.435,-7.947 113.538,-8.05 113.847,-8.05 113.95,-7.947 113.95,-7.153 114.053,-7.05 114.362,-7.05 114.465,-7.153 114.465,-7.947 114.568,-8.05 114.878,-8.05 114.981,-7.947 114.981,-7.153 115.084,-7.05 115.393,-7.05 115.496,-7.153 115.496,-7.947 115.599,-8.05 115.908,-8.05 116.012,-7.947 116.012,-7.153 116.115,-7.05 116.424,-7.05 116.527,-7.153 116.527,-7.947 116.63,-8.05 116.939,-8.05 117.042,-7.947 117.042,-7.653 117.145,-7.55 117.45,-7.55 117.8,-7.9 v1(118.25,-7.9)
Q1_D8: IC33.J19 IC42.C11 RP11.10 | length 48.1
  Top Layer w0.175: IC33.J19@90.5,-0.5 v1(91,-1) ; v1(118.25,-8.9) IC42.C11@118.75,-8.4
  MidLayer1 w0.109: v1(91,-1) 90.571,-1.429 90.571,-2.178 90.963,-2.571 91.178,-2.571 91.43,-2.822 91.43,-3.037 92.963,-4.571 93.178,-4.571 93.571,-4.963 93.571,-5.178 93.963,-5.571 94.178,-5.571 94.571,-5.963 94.571,-6.178 94.963,-6.571 95.178,-6.571 95.571,-6.963 95.571,-7.178 95.963,-7.571 96.178,-7.571 96.571,-7.963 96.571,-8.178 96.893,-8.5 98.951,-8.5 99.054,-8.603 99.054,-8.897 99.157,-9 99.466,-9 99.569,-8.897 99.569,-8.103 99.672,-8 99.982,-8 100.085,-8.103 100.085,-8.893 100.188,-8.997 100.497,-8.997 100.6,-8.893 100.6,-8.103 100.703,-8 101.012,-8 101.115,-8.103 101.115,-8.397 101.219,-8.5 101.528,-8.5 101.631,-8.397 101.631,-8.103 101.734,-8 102.043,-8 102.146,-8.103 102.146,-8.397 102.249,-8.5 102.45,-8.5 102.6,-8.35 102.6,-8.15 102.85,-7.9 103.1,-7.9 104.45,-9.25 104.574,-9.25 104.677,-9.147 104.677,-8.887 104.78,-8.784 105.089,-8.784 105.192,-8.887 105.192,-9.747 105.295,-9.85 105.604,-9.85 105.708,-9.747 105.708,-9.353 105.811,-9.25 106.12,-9.25 106.223,-9.353 106.223,-9.747 106.326,-9.85 106.635,-9.85 106.738,-9.747 106.738,-9.353 106.841,-9.25 107.151,-9.25 107.254,-9.353 107.254,-9.747 107.357,-9.85 107.666,-9.85 107.769,-9.747 107.769,-9.353 107.872,-9.25 108.181,-9.25 108.285,-9.353 108.285,-9.747 108.388,-9.85 108.697,-9.85 108.8,-9.747 108.8,-9.353 108.903,-9.25 109.212,-9.25 109.315,-9.353 109.315,-9.747 109.418,-9.85 109.728,-9.85 109.831,-9.747 109.831,-9.353 109.934,-9.25 110.243,-9.25 110.346,-9.353 110.346,-9.747 110.449,-9.85 110.758,-9.85 110.862,-9.747 110.862,-9.353 110.965,-9.25 111.274,-9.25 111.377,-9.353 111.377,-9.747 111.48,-9.85 111.789,-9.85 111.892,-9.747 111.892,-9.353 111.995,-9.25 112.3,-9.25 112.85,-8.7 113.8,-8.7 113.935,-8.835 113.935,-9.097 114.038,-9.2 114.347,-9.2 114.45,-9.097 114.45,-8.737 114.553,-8.634 114.862,-8.634 114.965,-8.737 114.965,-8.797 115.068,-8.9 115.378,-8.9 115.481,-8.797 115.481,-8.737 115.584,-8.634 115.893,-8.634 115.996,-8.737 115.996,-8.797 116.099,-8.9 116.408,-8.9 116.512,-8.797 116.512,-8.737 116.615,-8.634 116.924,-8.634 117.027,-8.737 117.027,-8.797 117.13,-8.9 v1(118.25,-8.9)
Q1_D9: IC33.L16 IC42.N10 RP11.9 | length 48.1
  Top Layer w0.175: IC33.L16@88.5,2.5 v1(89,3) ; v1(119.25,2.05) v1@119.25,2.1 ; v1@119.25,2.1 IC42.N10@119.75,1.6
  Mid-Layer 2 w0.109: v1(89,3) 89.43,3.43 91.178,3.43 91.571,3.037 91.571,2.822 91.822,2.571 92.037,2.571 92.571,2.037 92.571,1.822 92.893,1.5 96.14,1.5 96.243,1.603 96.243,1.635 96.346,1.738 96.624,1.738 96.861,1.5 98.201,1.5 98.304,1.603 98.304,1.697 98.407,1.8 98.717,1.8 98.82,1.697 98.82,1.603 98.923,1.5 99.232,1.5 99.335,1.603 99.335,1.642 99.438,1.745 99.708,1.745 99.954,1.5 100.45,1.5 100.9,1.95 101.055,1.95 101.158,2.053 101.158,2.147 101.261,2.25 101.57,2.25 101.673,2.147 101.673,1.753 101.776,1.65 102.085,1.65 102.188,1.753 102.188,2.147 102.292,2.25 102.601,2.25 102.704,2.147 102.704,1.753 102.807,1.65 103.116,1.65 103.219,1.753 103.219,2.147 103.322,2.25 103.632,2.25 103.735,2.147 103.735,1.753 103.838,1.65 104.147,1.65 104.25,1.753 104.25,2.147 104.353,2.25 104.662,2.25 104.765,2.147 104.765,1.753 104.869,1.65 105.178,1.65 105.281,1.753 105.281,2.147 105.384,2.25 105.693,2.25 105.796,2.147 105.796,1.753 105.899,1.65 106.209,1.65 106.312,1.753 106.312,2.147 106.415,2.25 106.724,2.25 106.827,2.147 106.827,1.753 106.93,1.65 107.239,1.65 107.342,1.753 107.342,2.147 107.446,2.25 107.755,2.25 107.858,2.147 107.858,1.753 107.961,1.65 108.27,1.65 108.373,1.753 108.373,2.147 108.476,2.25 108.786,2.25 108.889,2.147 108.889,1.753 108.992,1.65 109.301,1.65 109.404,1.753 109.404,2.147 109.507,2.25 109.816,2.25 109.919,2.147 109.919,1.753 110.023,1.65 110.332,1.65 110.435,1.753 110.435,2.147 110.538,2.25 110.847,2.25 110.95,2.147 110.95,1.753 111.053,1.65 111.363,1.65 111.466,1.753 111.466,2.147 111.569,2.25 111.878,2.25 111.981,2.147 111.981,1.753 112.084,1.65 112.393,1.65 112.496,1.753 112.496,2.147 112.6,2.25 112.909,2.25 113.012,2.147 113.012,1.753 113.115,1.65 113.424,1.65 113.527,1.753 113.527,2.147 113.63,2.25 113.94,2.25 114.043,2.147 114.043,1.753 114.146,1.65 114.455,1.65 114.558,1.753 114.558,2.147 114.661,2.25 114.97,2.25 115.073,2.147 115.073,1.753 115.177,1.65 115.486,1.65 115.589,1.753 115.589,2.147 115.692,2.25 116.001,2.25 116.104,2.147 116.104,2.046 116.2,1.95 117.2,1.95 117.6,1.55 118.75,1.55 119.2,2 119.25,2 v1(119.25,2.05)
Q1_D10: IC33.J17 IC42.M9 RP11.8 | length 48.2
  Top Layer w0.175: IC33.J17@90.5,1.5 v1(91,2) ; v1(120.25,1.1) IC42.M9@120.75,0.6
  Mid-Layer 2 w0.109: v1(91,2) 91.564,1.436 92.614,1.436 92.9,1.15 101.55,1.15 101.7,1.3 102.143,1.3 102.246,1.197 102.246,0.885 102.349,0.782 102.658,0.782 102.761,0.885 102.761,1.197 102.864,1.3 103.173,1.3 103.277,1.197 103.277,0.637 103.38,0.534 103.689,0.534 103.792,0.637 103.792,1.197 103.895,1.3 104.204,1.3 104.307,1.197 104.307,0.637 104.41,0.534 104.72,0.534 104.823,0.637 104.823,1.197 104.926,1.3 105.235,1.3 105.338,1.197 105.338,0.589 105.441,0.486 105.75,0.486 105.854,0.589 105.854,1.197 105.957,1.3 106.266,1.3 106.369,1.197 106.369,0.524 106.472,0.42 106.781,0.42 106.884,0.524 106.884,1.197 106.987,1.3 107.297,1.3 107.4,1.197 107.4,0.637 107.503,0.534 107.812,0.534 107.915,0.637 107.915,1.197 108.018,1.3 108.327,1.3 108.431,1.197 108.431,0.987 108.534,0.884 108.843,0.884 108.946,0.987 108.946,1.197 109.049,1.3 109.358,1.3 109.461,1.197 109.461,0.987 109.564,0.884 109.874,0.884 109.977,0.987 109.977,1.197 110.08,1.3 110.389,1.3 110.492,1.197 110.492,0.984 110.595,0.881 110.904,0.881 111.008,0.984 111.008,1.197 111.111,1.3 111.42,1.3 111.523,1.197 111.523,0.846 111.626,0.743 111.935,0.743 112.038,0.846 112.038,1.197 112.141,1.3 112.451,1.3 112.554,1.197 112.554,0.957 112.657,0.854 112.966,0.854 113.069,0.957 113.069,1.197 113.172,1.3 113.481,1.3 113.585,1.197 113.585,0.987 113.688,0.884 113.997,0.884 114.1,0.987 114.1,1.197 114.203,1.3 114.512,1.3 114.615,1.197 114.615,0.387 114.718,0.284 115.028,0.284 115.131,0.387 115.131,1.197 115.234,1.3 115.543,1.3 115.646,1.197 115.646,1.037 115.749,0.934 116.058,0.934 116.162,1.037 116.162,1.613 116.265,1.716 116.574,1.716 116.677,1.613 116.677,0.337 116.78,0.234 117.089,0.234 117.192,0.337 117.192,1.197 117.295,1.3 117.65,1.3 117.82,1.13 117.82,0.922 118.143,0.6 119.45,0.6 119.95,1.1 v1(120.25,1.1)
Q1_D11: IC33.M16 IC42.L9 RP11.7 | length 48.2
  Top Layer w0.175: IC33.M16@87.5,2.5 v1(88,3) ; v1(120.25,0.1) IC42.L9@120.75,-0.4
  Mid-Layer 2 w0.109: v1(88,3) 88.5,2.5 90.107,2.5 90.55,2.057 90.55,1.65 90.998,1.202 92.51,1.202 92.814,0.898 93.372,0.898 93.469,0.8 99.65,0.8 99.773,0.677 99.773,0.607 99.896,0.484 100.265,0.484 100.388,0.607 100.388,0.677 100.512,0.8 100.881,0.8 101.004,0.677 101.004,0.607 101.127,0.484 101.496,0.484 101.619,0.607 101.619,0.677 101.742,0.8 102,0.8 103,-0.2 103.185,-0.2 103.308,-0.077 103.308,0.177 103.431,0.3 103.8,0.3 103.923,0.177 103.923,-0.443 104.046,-0.566 104.415,-0.566 104.538,-0.443 104.538,0.177 104.662,0.3 105.031,0.3 105.154,0.177 105.154,-0.443 105.277,-0.566 105.646,-0.566 105.769,-0.443 105.769,0.177 105.892,0.3 106.262,0.3 106.385,0.177 106.385,-0.443 106.508,-0.566 106.877,-0.566 107,-0.443 107,0.177 107.123,0.3 107.492,0.3 107.615,0.177 107.615,-0.077 107.739,-0.2 107.95,-0.2 108.358,0.208 108.358,0.527 108.481,0.65 108.85,0.65 108.973,0.527 108.973,0.173 109.096,0.05 109.465,0.05 109.588,0.173 109.588,0.527 109.712,0.65 110.081,0.65 110.204,0.527 110.204,0.173 110.327,0.05 110.696,0.05 110.819,0.173 110.819,0.527 110.942,0.65 111.312,0.65 111.435,0.527 111.435,0.173 111.558,0.05 111.927,0.05 112.05,0.173 112.05,0.527 112.173,0.65 112.542,0.65 112.665,0.527 112.665,0.173 112.789,0.05 113.158,0.05 113.281,0.173 113.281,0.527 113.404,0.65 113.773,0.65 113.896,0.527 113.896,0.173 114.019,0.05 115.15,0.05 115.25,-0.05 115.55,-0.05 115.662,0.062 115.662,0.577 115.785,0.7 116.154,0.7 116.277,0.577 116.277,-0.442 116.4,-0.565 116.769,-0.565 116.892,-0.442 116.892,-0.123 117.015,0 117.2,0 117.6,-0.4 119.45,-0.4 119.95,0.1 v1(120.25,0.1)
Q1_D12: IC33.K18 IC42.J9 RP11.5 | length 48.2
  Top Layer w0.175: IC33.K18@89.5,0.5 v1(90,0) ; v1(120.25,-1.9) IC42.J9@120.75,-2.4
  Mid-Layer 2 w0.109: v1(90,0) 90.734,0.734 92.316,0.734 92.434,0.616 92.62,0.43 93.178,0.43 93.5,0.107 93.5,-0.25 93.75,-0.5 95.623,-0.5 95.746,-0.623 95.746,-0.777 95.869,-0.9 96.238,-0.9 96.362,-0.777 96.362,-0.623 96.485,-0.5 98.65,-0.5 99.05,-0.9 101.2,-0.9 102.3,-2 103.105,-2 103.208,-1.897 103.208,-1.803 103.311,-1.7 103.62,-1.7 103.723,-1.803 103.723,-2.197 103.826,-2.3 104.135,-2.3 104.238,-2.197 104.238,-1.803 104.342,-1.7 104.651,-1.7 104.754,-1.803 104.754,-2.197 104.857,-2.3 105.166,-2.3 105.269,-2.197 105.269,-1.803 105.372,-1.7 105.682,-1.7 105.785,-1.803 105.785,-2.197 105.888,-2.3 106.197,-2.3 106.3,-2.197 106.3,-1.803 106.403,-1.7 106.712,-1.7 106.815,-1.803 106.815,-2.197 106.919,-2.3 107.228,-2.3 107.331,-2.197 107.331,-2.069 107.75,-1.65 108.105,-1.65 108.208,-1.547 108.208,-1.353 108.311,-1.25 108.62,-1.25 108.723,-1.353 108.723,-1.947 108.826,-2.05 109.135,-2.05 109.238,-1.947 109.238,-1.353 109.342,-1.25 109.651,-1.25 109.754,-1.353 109.754,-1.947 109.857,-2.05 110.166,-2.05 110.269,-1.947 110.269,-1.353 110.372,-1.25 110.682,-1.25 110.785,-1.353 110.785,-1.947 110.888,-2.05 111.197,-2.05 111.3,-1.947 111.3,-1.353 111.403,-1.25 111.712,-1.25 111.815,-1.353 111.815,-1.947 111.919,-2.05 112.228,-2.05 112.331,-1.947 112.331,-1.353 112.434,-1.25 112.743,-1.25 112.846,-1.353 112.846,-1.947 112.949,-2.05 113.259,-2.05 113.362,-1.947 113.362,-1.353 113.465,-1.25 113.774,-1.25 113.877,-1.353 113.877,-1.947 113.98,-2.05 114.289,-2.05 114.392,-1.947 114.392,-1.353 114.496,-1.25 114.805,-1.25 114.908,-1.353 114.908,-1.947 115.011,-2.05 115.32,-2.05 115.423,-1.947 115.423,-1.353 115.526,-1.25 115.7,-1.25 116.8,-2.35 119.85,-2.35 120.25,-1.95 v1(120.25,-1.9)
Q1_D13: IC33.G15 IC42.G10 RP11.4 | length 48.2
  Top Layer w0.175: IC33.G15@92.5,3.5 v1(93,4) ; v1(119.25,-4.9) IC42.G10@119.75,-4.4
  MidLayer1 w0.109: v1(93,4) 93.571,3.43 93.571,1.822 94.963,0.43 95.178,0.43 95.571,0.037 95.571,-0.178 96.843,-1.45 98.855,-1.45 98.958,-1.347 98.958,-0.853 99.061,-0.75 99.37,-0.75 99.473,-0.853 99.473,-2.047 99.576,-2.15 99.885,-2.15 99.988,-2.047 99.988,-0.853 100.092,-0.75 100.401,-0.75 100.504,-0.853 100.504,-2.047 100.607,-2.15 100.916,-2.15 101.019,-2.047 101.019,-0.853 101.122,-0.75 101.432,-0.75 101.535,-0.853 101.535,-1.347 101.638,-1.45 102,-1.45 102.109,-1.559 102.109,-1.705 101.961,-1.853 101.961,-1.999 102.18,-2.218 102.325,-2.218 102.547,-1.997 102.633,-1.91 102.779,-1.91 102.998,-2.129 102.998,-2.274 102.911,-2.361 102.724,-2.548 102.724,-2.694 102.943,-2.912 103.089,-2.912 103.276,-2.726 103.362,-2.639 103.508,-2.639 103.727,-2.858 103.727,-3.003 103.453,-3.277 103.453,-3.422 103.672,-3.641 103.818,-3.641 104.091,-3.368 104.237,-3.368 104.456,-3.586 104.456,-3.732 104.442,-3.746 104.442,-3.892 104.75,-4.2 104.905,-4.2 105.008,-4.097 105.008,-3.937 105.111,-3.834 105.42,-3.834 105.523,-3.937 105.523,-4.763 105.626,-4.866 105.935,-4.866 106.038,-4.763 106.038,-4.303 106.142,-4.2 106.451,-4.2 106.554,-4.303 106.554,-4.763 106.657,-4.866 106.966,-4.866 107.069,-4.763 107.069,-4.303 107.172,-4.2 107.482,-4.2 107.585,-4.303 107.585,-4.763 107.688,-4.866 107.997,-4.866 108.1,-4.763 108.1,-4.077 108.203,-3.974 108.512,-3.974 108.615,-4.077 108.615,-4.763 108.719,-4.866 109.028,-4.866 109.131,-4.763 109.131,-4.303 109.234,-4.2 109.543,-4.2 109.646,-4.303 109.646,-4.763 109.749,-4.866 110.059,-4.866 110.162,-4.763 110.162,-4.303 110.265,-4.2 112.9,-4.2 113.1,-4 117.65,-4 118,-4.35 118.7,-4.35 v1(119.25,-4.9)
Q1_D14: IC33.G17 IC42.F9 RP11.3 | length 48
  Top Layer w0.175: IC33.G17@92.5,1.5 v1(93,2) ; v1(120.25,-5.9) IC42.F9@120.75,-5.4
  MidLayer1 w0.109: v1(93,2) 93.799,1.201 93.799,1.055 93.61,0.867 93.61,0.721 93.829,0.502 93.974,0.502 94.163,0.691 94.309,0.691 94.571,0.43 94.571,-0.178 94.963,-0.57 95.178,-0.57 95.43,-0.822 95.43,-2.037 96.893,-3.5 97.305,-3.5 97.408,-3.397 97.408,-3.135 97.511,-3.032 97.82,-3.032 97.923,-3.135 97.923,-3.397 98.026,-3.5 99.62,-3.5 99.723,-3.603 99.723,-4.097 99.826,-4.2 100.135,-4.2 100.238,-4.097 100.238,-3.603 100.342,-3.5 100.651,-3.5 100.754,-3.603 100.754,-4.097 100.857,-4.2 101.166,-4.2 101.269,-4.097 101.269,-3.603 101.372,-3.5 102.15,-3.5 102.259,-3.609 102.259,-3.755 102.113,-3.902 102.113,-4.047 102.332,-4.266 102.477,-4.266 102.624,-4.12 102.77,-4.12 102.988,-4.338 102.988,-4.484 102.974,-4.498 102.974,-4.644 103.193,-4.862 103.339,-4.862 103.353,-4.848 103.498,-4.848 104.2,-5.55 104.355,-5.55 104.458,-5.447 104.458,-5.356 104.561,-5.253 104.87,-5.253 104.973,-5.356 104.973,-5.447 105.076,-5.55 105.561,-5.55 105.761,-5.35 106.07,-5.35 106.173,-5.453 106.173,-5.647 106.276,-5.75 106.585,-5.75 106.688,-5.647 106.688,-5.453 106.792,-5.35 107.101,-5.35 107.204,-5.453 107.204,-5.647 107.307,-5.75 107.616,-5.75 107.719,-5.647 107.719,-5.453 107.822,-5.35 108.132,-5.35 108.235,-5.453 108.235,-5.647 108.338,-5.75 108.647,-5.75 108.75,-5.647 108.75,-5.453 108.853,-5.35 109.162,-5.35 109.265,-5.453 109.265,-5.647 109.369,-5.75 109.678,-5.75 109.781,-5.647 109.781,-5.453 109.884,-5.35 110.193,-5.35 110.393,-5.55 110.863,-5.55 110.946,-5.633 110.946,-6.083 111.029,-6.166 111.278,-6.166 111.362,-6.083 111.362,-5.633 111.445,-5.55 111.694,-5.55 111.777,-5.633 111.777,-6.083 111.86,-6.166 112.109,-6.166 112.192,-6.083 112.192,-5.633 112.275,-5.55 112.505,-5.55 112.608,-5.447 112.608,-5.153 112.711,-5.05 113.02,-5.05 113.123,-5.153 113.123,-5.947 113.226,-6.05 113.55,-6.05 113.65,-5.95 113.65,-5.55 113.716,-5.484 114.534,-5.484 114.623,-5.573 114.623,-6.063 114.726,-6.166 115.035,-6.166 115.138,-6.063 115.138,-5.503 115.242,-5.4 115.551,-5.4 115.654,-5.503 115.654,-5.954 115.8,-6.1 116.097,-6.1 116.2,-5.997 116.2,-5.503 116.303,-5.4 116.612,-5.4 116.715,-5.503 116.715,-5.997 116.818,-6.1 117.128,-6.1 117.231,-5.997 117.231,-5.237 117.334,-5.134 117.643,-5.134 117.746,-5.237 117.746,-5.297 117.849,-5.4 119.75,-5.4 v1(120.25,-5.9)
Q1_D15: IC33.H18 IC42.D10 RP11.2 | length 48.1
  Top Layer w0.175: IC33.H18@91.5,0.5 v1(92,0) ; v1(119.25,-7.9) IC42.D10@119.75,-7.4
  MidLayer1 w0.109: v1(92,0) 91.546,-0.454 91.546,-2.197 91.919,-2.571 92.178,-2.571 92.631,-3.024 92.631,-3.229 92.973,-3.571 93.178,-3.571 93.571,-3.963 93.571,-4.178 93.963,-4.571 94.178,-4.571 94.571,-4.963 94.571,-5.178 94.822,-5.43 95.037,-5.43 95.571,-5.963 95.571,-6.178 95.963,-6.571 96.178,-6.571 96.571,-6.963 96.571,-7.178 96.822,-7.43 99.455,-7.43 99.558,-7.326 99.558,-7.137 99.661,-7.034 99.97,-7.034 100.073,-7.137 100.073,-7.726 100.176,-7.83 100.485,-7.83 100.588,-7.726 100.588,-7.137 100.692,-7.034 101.001,-7.034 101.104,-7.137 101.104,-7.726 101.207,-7.83 101.516,-7.83 101.619,-7.726 101.619,-7.137 101.722,-7.034 102.032,-7.034 102.135,-7.137 102.135,-7.726 102.238,-7.83 102.547,-7.83 102.65,-7.726 102.65,-7.533 102.753,-7.43 103.13,-7.43 104.25,-8.55 104.805,-8.55 104.908,-8.447 104.908,-8.253 105.011,-8.15 105.32,-8.15 105.423,-8.253 105.423,-8.847 105.526,-8.95 105.835,-8.95 105.938,-8.847 105.938,-8.253 106.042,-8.15 106.351,-8.15 106.454,-8.253 106.454,-8.847 106.557,-8.95 106.866,-8.95 106.969,-8.847 106.969,-8.253 107.072,-8.15 107.382,-8.15 107.485,-8.253 107.485,-8.847 107.588,-8.95 107.897,-8.95 108,-8.847 108,-8.253 108.103,-8.15 108.412,-8.15 108.515,-8.253 108.515,-8.847 108.619,-8.95 108.928,-8.95 109.031,-8.847 109.031,-8.253 109.134,-8.15 109.443,-8.15 109.546,-8.253 109.546,-8.847 109.649,-8.95 109.959,-8.95 110.062,-8.847 110.062,-8.253 110.165,-8.15 110.474,-8.15 110.577,-8.253 110.577,-8.847 110.68,-8.95 110.989,-8.95 111.092,-8.847 111.092,-8.387 111.196,-8.284 111.505,-8.284 111.608,-8.387 111.608,-8.847 111.711,-8.95 112.02,-8.95 112.123,-8.847 112.123,-8.653 112.376,-8.4 118.85,-8.4 119.25,-8 v1(119.25,-7.9)
Q1_D16: IC33.L19 IC42.C9 RP9.10 | length 48.2
  Top Layer w0.175: IC33.L19@88.5,-0.5 v1(89,-1) ; v1(120.25,-8.9) IC42.C9@120.75,-8.4
  MidLayer1 w0.109: v1(89,-1) 88.571,-1.429 88.571,-2.178 88.963,-2.571 89.178,-2.571 89.571,-2.963 89.571,-3.178 89.963,-3.571 90.178,-3.571 90.571,-3.963 90.571,-4.178 90.963,-4.571 91.178,-4.571 91.43,-4.822 91.43,-5.037 91.963,-5.571 92.178,-5.571 92.5,-5.893 92.5,-6.107 92.963,-6.571 93.178,-6.571 93.571,-6.963 93.571,-7.178 93.963,-7.571 94.178,-7.571 94.571,-7.963 94.571,-8.178 94.963,-8.571 95.178,-8.571 95.55,-8.943 95.55,-9.157 95.963,-9.571 96.178,-9.571 96.571,-9.963 96.571,-10.178 96.822,-10.43 99.37,-10.43 99.85,-9.95 100.72,-9.95 100.823,-10.053 100.823,-10.347 100.926,-10.45 101.235,-10.45 101.338,-10.347 101.338,-10.053 101.442,-9.95 101.9,-9.95 102.05,-9.8 102.205,-9.8 102.308,-9.903 102.308,-10.197 102.411,-10.3 102.72,-10.3 102.823,-10.197 102.823,-9.403 102.926,-9.3 103.235,-9.3 103.338,-9.403 103.338,-9.697 103.442,-9.8 103.75,-9.8 104.38,-10.43 104.53,-10.43 104.8,-10.7 105.261,-10.7 105.461,-10.5 105.77,-10.5 105.873,-10.603 105.873,-10.797 105.976,-10.9 106.285,-10.9 106.388,-10.797 106.388,-10.603 106.492,-10.5 106.801,-10.5 106.904,-10.603 106.904,-10.797 107.007,-10.9 107.316,-10.9 107.419,-10.797 107.419,-10.603 107.522,-10.5 107.832,-10.5 107.935,-10.603 107.935,-10.797 108.038,-10.9 108.347,-10.9 108.45,-10.797 108.45,-10.603 108.553,-10.5 108.862,-10.5 108.965,-10.603 108.965,-10.797 109.069,-10.9 109.378,-10.9 109.481,-10.797 109.481,-10.603 109.584,-10.5 109.893,-10.5 109.996,-10.603 109.996,-10.797 110.099,-10.9 110.409,-10.9 110.512,-10.797 110.512,-10.603 110.615,-10.5 110.924,-10.5 111.027,-10.603 111.027,-10.797 111.13,-10.9 111.439,-10.9 111.542,-10.797 111.542,-10.603 111.646,-10.5 111.955,-10.5 112.155,-10.7 112.455,-10.7 112.558,-10.597 112.558,-10.103 112.661,-10 112.97,-10 113.073,-10.103 113.073,-10.597 113.176,-10.7 113.35,-10.7 114.05,-10 114.624,-10 114.727,-10.103 114.727,-10.397 114.83,-10.5 115.139,-10.5 115.242,-10.397 115.242,-10.103 115.345,-10 115.345,-9.855 115.55,-9.65 119.55,-9.65 120.25,-8.95 v1(120.25,-8.9)
Q1_D17: IC33.M18 IC42.B9 RP9.9 | length 48.2
  Top Layer w0.175: IC33.M18@87.5,0.5 v1(88,0) ; v1(120.25,-9.9) IC42.B9@120.75,-9.4
  MidLayer1 w0.109: v1(88,0) 88.43,-0.43 88.43,-1.178 88.037,-1.571 87.822,-1.571 87.571,-1.822 87.571,-2.178 87.963,-2.571 88.178,-2.571 88.43,-2.822 88.43,-3.037 88.963,-3.571 89.178,-3.571 89.571,-3.963 89.571,-4.178 89.963,-4.571 90.178,-4.571 90.571,-4.963 90.571,-5.178 91.963,-6.571 92.178,-6.571 92.571,-6.963 92.571,-7.178 92.963,-7.571 93.178,-7.571 93.43,-7.822 93.43,-8.037 93.963,-8.571 94.178,-8.571 94.571,-8.963 94.571,-9.178 94.963,-9.571 95.178,-9.571 95.571,-9.963 95.571,-10.178 95.963,-10.571 96.178,-10.571 96.62,-11.013 96.62,-11.178 96.872,-11.43 99.32,-11.43 99.55,-11.2 100.005,-11.2 100.108,-11.097 100.108,-10.903 100.211,-10.8 100.52,-10.8 100.623,-10.903 100.623,-11.497 100.726,-11.6 101.035,-11.6 101.138,-11.497 101.138,-10.903 101.242,-10.8 101.551,-10.8 101.654,-10.903 101.654,-11.497 101.757,-11.6 102.066,-11.6 102.169,-11.497 102.169,-10.903 102.272,-10.8 102.582,-10.8 102.685,-10.903 102.685,-11.497 102.788,-11.6 103.097,-11.6 103.2,-11.497 103.2,-10.903 103.303,-10.8 103.612,-10.8 103.715,-10.903 103.715,-11.497 103.819,-11.6 104.128,-11.6 104.231,-11.497 104.231,-10.977 104.334,-10.874 104.643,-10.874 104.746,-10.977 104.746,-11.097 104.849,-11.2 115.05,-11.2 116.35,-9.9 119.15,-9.9 v1(120.25,-9.9)